# EAGLE board Canberry 2.0 (EAGLE 6.6.0)
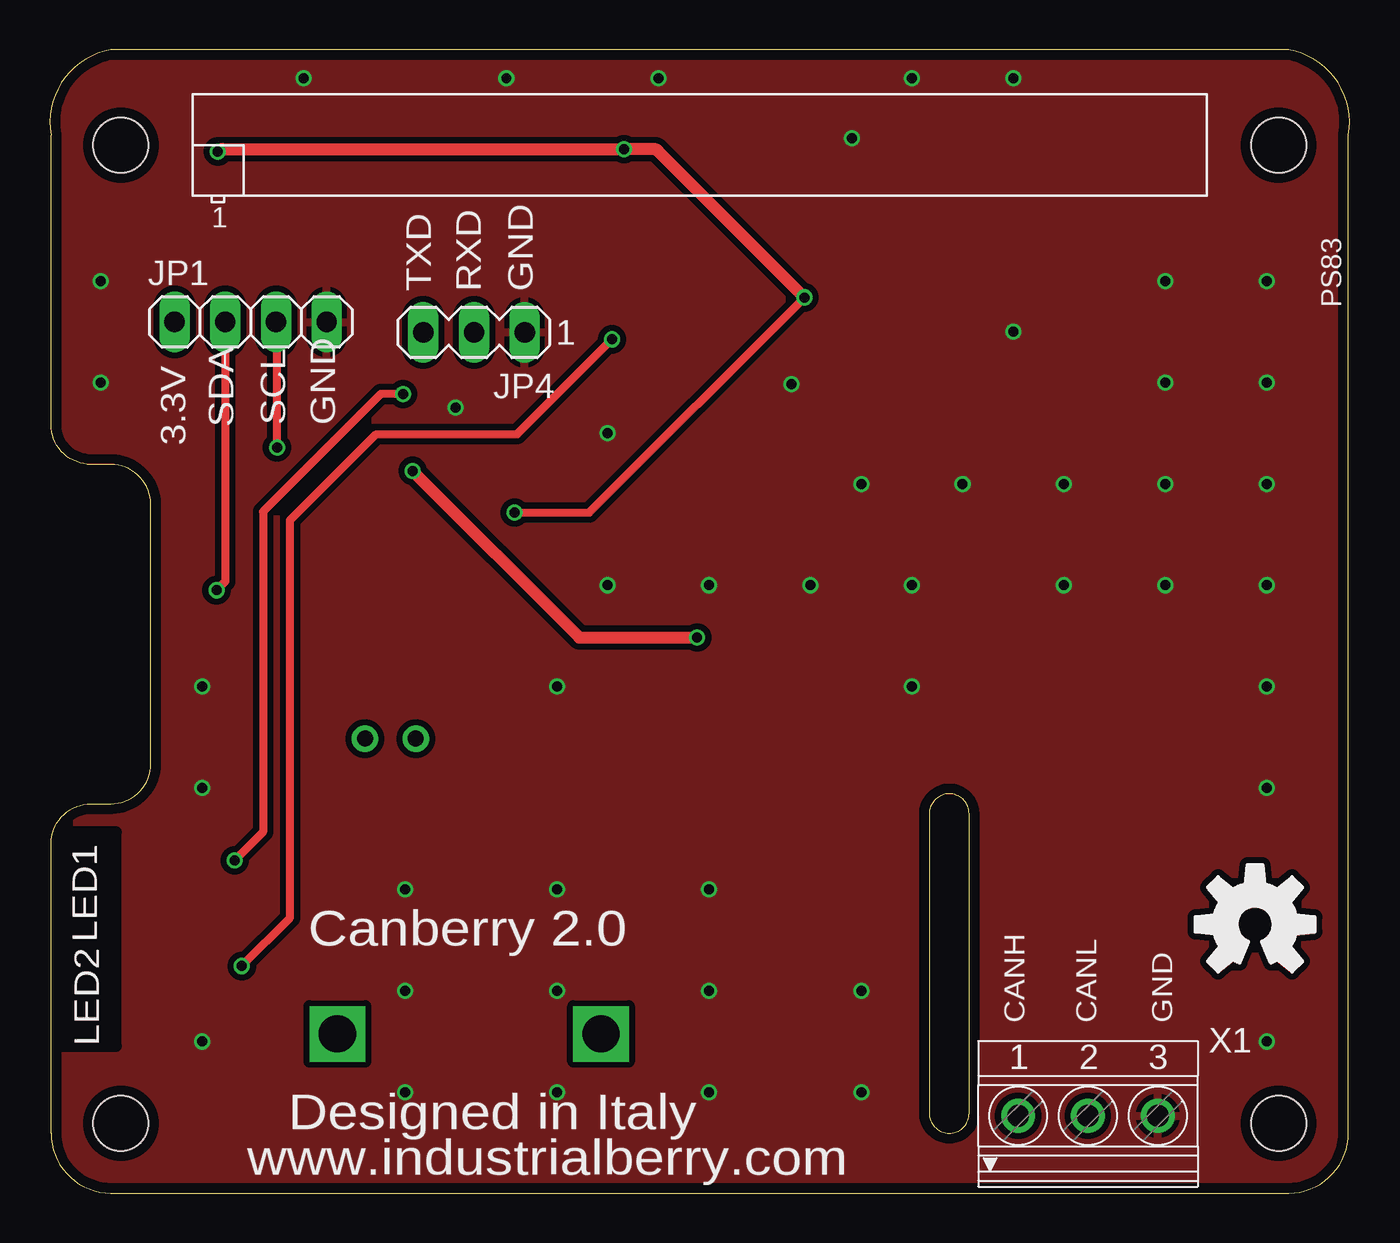
[diagram p0: board, top side]
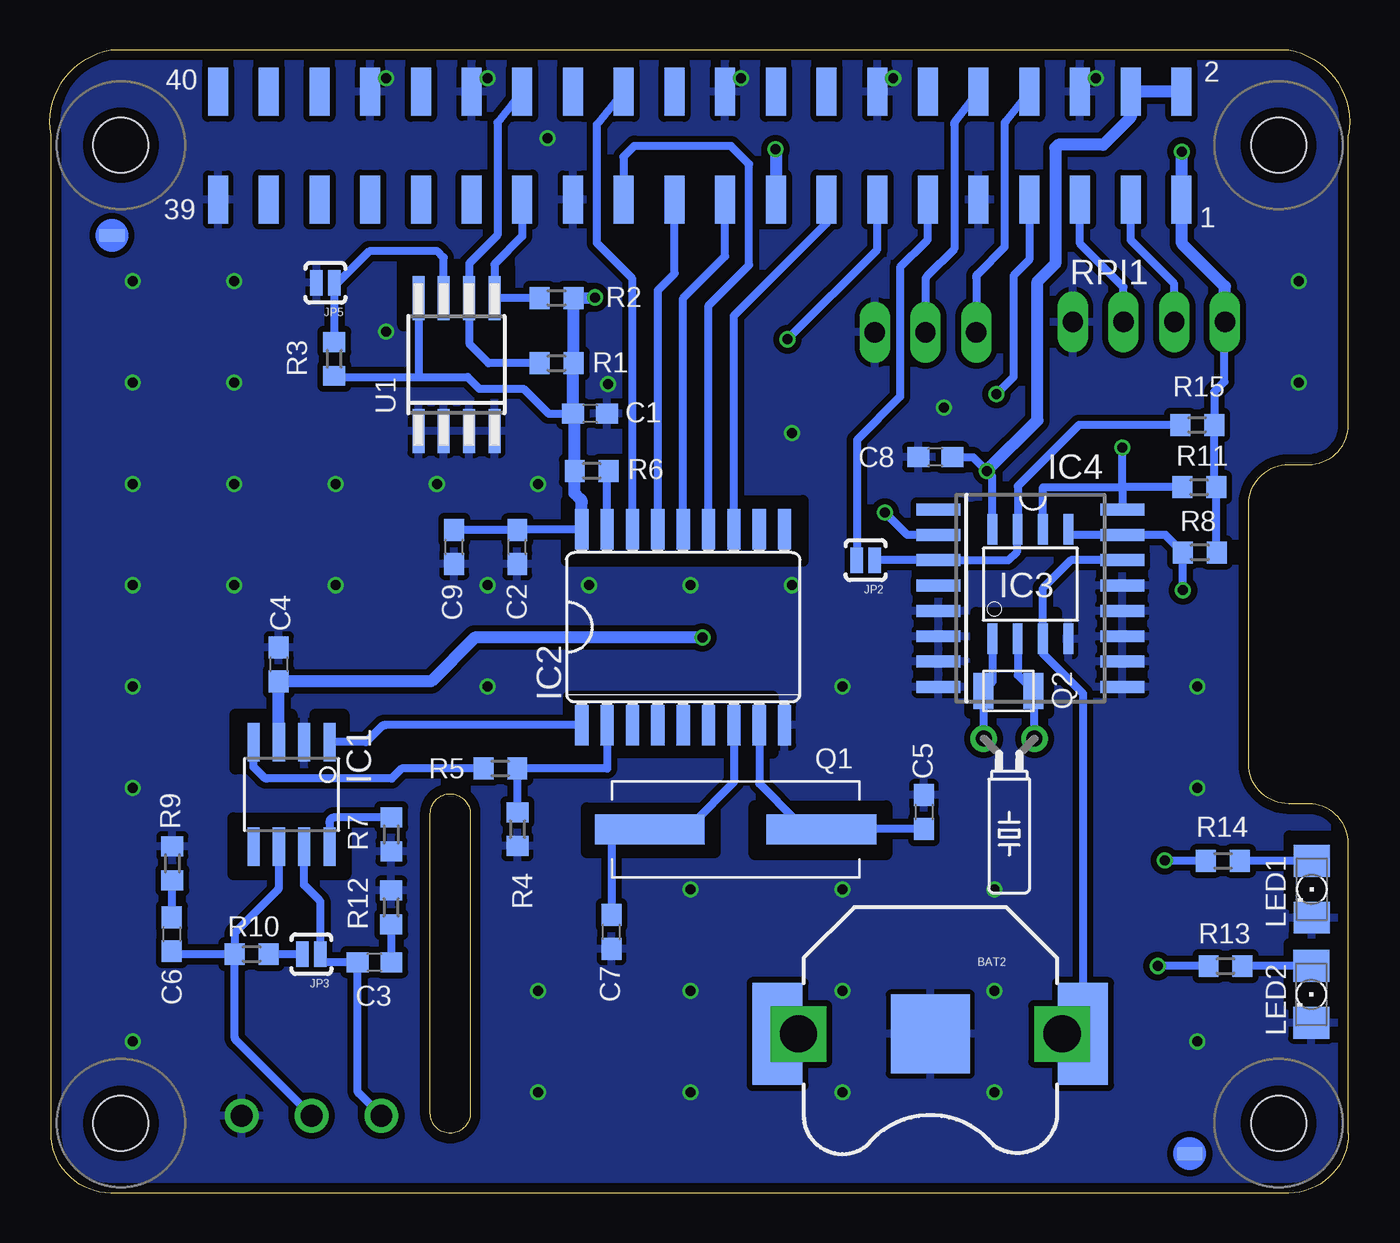
[diagram p1: board, bottom side, seen from below]

Size 65.11 x 57.27 mm. Coordinates in mm from the lower left corner, seen from the top.
Copper layers (1*16): Top 0.035mm / dielectric 1.5mm / Bottom 0.035mm
Design rules "ITEADstudio_DRC *": minimum track width 10mil, minimum drill 12mil, track to track 10mil, track to pad 10mil, pad to pad 10mil, via to via 10mil, smd to smd 0mil, copper to edge 20mil, drill to drill 20mil, minimum pad ring 10mil, minimum via ring 6mil, stop-mask expansion 2mil, vias tented up to drill 100mil, thermal gap 10mil
tRestrict: area 0.6,7.4 to 3.3,18.1
bRestrict: area 0.8,14.5 to 3,17.9; area 0.8,9.5 to 3,12.5; area 23.2,17 to 29.8,19.4; area 31.8,17.1 to 38.2,19.3; area 28.9,22.1 to 39.1,24.9; area 27.4,31.7 to 39.2,34.7; area 50.3,16 to 55.9,18.8; area 53,21.3 to 55.8,24; area 50.4,21.5 to 51.8,24; area 42.1,43.5 to 47.4,46.4; area 14.7,26.7 to 18.7,29.1; area 15.1,24.1 to 19,26.3; area 13.5,32.2 to 18.7,34.4

## Footprints (pad centres in the part's own frame; a part is rotated, then mirrored left to right if it is on the bottom)
BATTCON_12MM = smd 3.962 x 3.962: GND 0,0 | smd 2.5 x 5.1: PWR@1 -7.65,0; PWR@2 7.65,0
BATTCON_12MM_PTH = smd 3.962 x 3.962: GND 0,0 | drill 1.854 square: VCC@1 -6.604,0; VCC@2 6.604,0
C0603 = smd 1.1 x 1: 1 -0.85,0; 2 0.85,0
FIDUCIAL-LAMINA = smd 1.27 x 0.635: P$1 0,0
SO08 = smd 0.61 x 1.905: 1 -1.905,-2.616; 2 -0.635,-2.616; 3 0.635,-2.616; 4 1.905,-2.616; 5 1.905,2.616; 6 0.635,2.616; 7 -0.635,2.616; 8 -1.905,2.616
SO18L = smd 0.66 x 2.032: 1 -5.08,-4.902; 2 -3.81,-4.902; 3 -2.54,-4.902; 4 -1.27,-4.902; 5 0,-4.902; 6 1.27,-4.902; 7 2.54,-4.902; 8 3.81,-4.902; 9 5.08,-4.902; 10 5.08,4.902; 11 3.81,4.902; 12 2.54,4.902; 13 1.27,4.902; 14 0,4.902; 15 -1.27,4.902; 16 -2.54,4.902; 17 -3.81,4.902; 18 -5.08,4.902
SO8 = smd 0.5 x 1.524: 1 -1.905,-2.743; 2 -0.635,-2.743; 3 0.635,-2.743; 4 1.905,-2.743; 5 1.905,2.743; 6 0.635,2.743; 7 -0.635,2.743; 8 -1.905,2.743
SOIC-16W = smd 0.6 x 2.2: 1 -4.445,-4.6; 2 -3.175,-4.6; 3 -1.905,-4.6; 4 -0.635,-4.6; 5 0.635,-4.6; 6 1.905,-4.6; 7 3.175,-4.6; 8 4.445,-4.6; 9 4.445,4.6; 10 3.175,4.6; 11 1.905,4.6; 12 0.635,4.6; 13 -0.635,4.6; 14 -1.905,4.6; 15 -3.175,4.6; 16 -4.445,4.6
1X04 = drill 1.016 long: 1 -3.81,0; 2 -1.27,0; 3 1.27,0; 4 3.81,0
SJ_2S-NO = smd 0.635 x 1.27: 1 -0.45,0; 2 0.45,0
MA03-1 = drill 1.016 long: 1 -2.54,0; 2 0,0; 3 2.54,0
1206 = smd 1.6 x 1.803: A -1.422,0; C 1.422,0
CRYSTAL-SMD-10.5X4.8-2PIN = smd 5.5 x 1.5: P$1 -4.3,0; P$2 4.3,0
TC26H = drill 0.813: 1 -1.27,0; 2 1.27,0
R0603 = smd 1 x 1.1: 1 -0.85,0; 2 0.85,0
CONNECTOR_B+_SMT = smd 1 x 2.4 bottom: 1 -24.18,-2.7; 2 -24.18,2.7; 3 -21.64,-2.7; 4 -21.64,2.7; 5 -19.1,-2.7; 6 -19.1,2.7; 7 -16.56,-2.7; 8 -16.56,2.7; 9 -14.02,-2.7; 10 -14.02,2.7; 11 -11.48,-2.7; 12 -11.48,2.7; 13 -8.94,-2.7; 14 -8.94,2.7; 15 -6.4,-2.7; 16 -6.4,2.7; 17 -3.86,-2.7; 18 -3.86,2.7; 19 -1.32,-2.7; 20 -1.32,2.7; 21 1.22,-2.7; 22 1.22,2.7; 23 3.76,-2.7; 24 3.76,2.7; 25 6.3,-2.7; 26 6.3,2.7; 27 8.84,-2.7; 28 8.84,2.7; 29 11.38,-2.7; 30 11.38,2.7; 31 13.92,-2.7; 32 13.92,2.7; 33 16.46,-2.7; 34 16.46,2.7; 35 19,-2.7; 36 19,2.7; 37 21.54,-2.7; 38 21.54,2.7; 39 24.08,-2.7; 40 24.08,2.7 | hole 2.75: -29.05,-48.97; -29.05,0.03; 28.95,-48.97; 28.95,0.03
SOIC8 = smd 0.6 x 2.2: 1 -1.905,-3.33; 2 -0.635,-3.33; 3 0.635,-3.33; 4 1.905,-3.33; 5 1.905,3.33; 6 0.635,3.33; 7 -0.635,3.33; 8 -1.905,3.33
FC-135 = smd 1 x 1.8: 1 -1.3,0; 2 1.2,0
1751251 = drill 1.1 pad 1.7: 1 -3.5,-0.1; 2 0,-0.1; 3 3.5,-0.1

## Placement (x,y rotation side)
BAT1  [BATTCON_12MM]  21,7.97 180 bottom
BAT2  [BATTCON_12MM_PTH]  21,7.97 180 bottom
C1  100nF  [C0603]  38.04,39.05 180 bottom
C2  100nF  [C0603]  41.69,32.36 90 bottom
C3  n.c.  [C0603]  48.85,11.56 180 bottom
C4  100nF  [C0603]  53.64,26.49 270 bottom
C5  22pF  [C0603]  21.32,19.09 270 bottom
C6  n.c.  [C0603]  59,12.97 270 bottom
C7  22pF  [C0603]  36.97,13.08 90 bottom
C8  100nF  [C0603]  20.75,36.87 180 bottom
C9  1uF  [C0603]  44.85,32.37 90 bottom
F1  [FIDUCIAL-LAMINA]  8,1.97 0 bottom
F2  [FIDUCIAL-LAMINA]  62,47.97 0 bottom
IC1  MCP2551  [SO08]  53,19.97 180 bottom
IC2  MCP2515-I  [SO18L]  33.38,28.35 0 bottom
IC3  DS1307  [SO8]  15.99,30.51 0 bottom
IC4  DS3231  [SOIC-16W]  15.99,29.8 270 bottom
JP1  [1X04]  10.05,43.64 0 top
JP2  [SJ_2S-NO]  24.24,31.71 180 bottom
JP3  [SJ_2S-NO]  52,11.97 180 bottom
JP4  [MA03-1]  21.24,43.12 180 top
JP5  [SJ_2S-NO]  51.3,45.6 180 bottom
LED1  [1206]  1.89,15.22 270 bottom
LED2  [1206]  1.92,9.95 270 bottom
Q1  16Mhz  [CRYSTAL-SMD-10.5X4.8-2PIN]  30.75,18.22 0 bottom
Q2  32.768kHz  [TC26H]  17.05,22.77 180 bottom
R1  3.9k  [R0603]  39.72,41.57 180 bottom
R2  3.9k  [R0603]  39.73,44.84 180 bottom
R3  1k  [R0603]  50.86,41.79 90 bottom
R4  18k  [R0603]  41.68,18.23 270 bottom
R5  10k  [R0603]  42.54,21.27 0 bottom
R6  4k7  [R0603]  37.96,36.18 0 bottom
R7  4k7  [R0603]  48,17.97 90 bottom
R8  10k  [R0603]  7.5,32.1 0 bottom
R9  n.c.  [R0603]  58.97,16.52 90 bottom
R10  120R  [R0603]  55,11.97 0 bottom
R11  10k  [R0603]  7.53,35.36 0 bottom
R12  n.c.  [R0603]  48.01,14.31 90 bottom
R13  500R  [R0603]  6.21,11.37 0 bottom
R14  500R  [R0603]  6.34,16.64 0 bottom
R15  10k  [R0603]  7.63,38.48 0 bottom
RPI1  [CONNECTOR_B+_SMT]  32.6,52.47 0 top
U1  EEPROM24  [SOIC8]  44.74,41.5 0 bottom
U$1  XTAL32K  [FC-135]  17.03,25.15 0 bottom
X1  1751251  [1751251]  52,3.97 0 top

## Library data of the parts
BAT1 BAT2 JP2 JP3 JP5 Q1 = SparkFun
C1-C9 R1-R15 = rcl
F1 F2 IC3 U$1 = PierpaoloSmartSpaceSolutions
IC1 = microchip-dspic
IC2 = mcp2515
IC4 = DS3231_industrialberry
JP1 = pinhead
JP4 = MirkoSmartSpaceSolutions
LED1 LED2 = led
Q2 = crystal
RPI1 = Connector_B+
U1 = FLYFISH
X1 = con-phoenix-350

## Nets
+5V: C4.2 C8.1 IC1.3 IC3.8 RPI1.2 RPI1.4
GND: BAT1.GND BAT2.GND C1.1 C2.1 C4.1 C5.1 C7.1 C8.2 C9.1 IC1.2 IC2.9 IC3.4 IC4.5 IC4.6 IC4.7 IC4.8 IC4.9 IC4.10 IC4.11 IC4.12 IC4.13 JP1.4 JP4.1 JP5.2 LED1.C LED2.C R4.2 R7.1 R9.2 R12.2 RPI1.6 RPI1.9 RPI1.14 RPI1.20 RPI1.25 RPI1.30 RPI1.34 RPI1.39 U1.1 U1.2 U1.3 U1.4 X1.3
ID_SC: R1.2 RPI1.28 U1.6
ID_SD: R2.2 RPI1.27 U1.5
LED1: R13.1 RPI1.13
LED2: R14.1 RPI1.7
N$1: IC4.4
N$3: JP5.1 R3.2 U1.7
N$4: IC3.7 IC4.3 JP2.1 R15.1
N$6: C7.2 IC2.7 Q1.P$1
N$7: IC2.2 R4.1 R5.2
N$8: IC1.4 R5.1
N$9: IC1.1 IC2.1
N$10: IC1.8 R7.2
N$11: IC2.17 R6.2
N$12: C6.1 R9.1
N$13: C3.1 R12.1
N$14: LED2.A R13.2
N$15: C5.2 IC2.8 Q1.P$2
N$16: LED1.A R14.2
N$22: C3.2 IC1.7 JP3.1 X1.1
N$23: C6.2 IC1.6 R10.1 X1.2
N$24: JP3.2 R10.2
OSCI: IC3.1 Q2.2 U$1.1
OSCO: IC3.2 Q2.1 U$1.2
OUT: JP2.2 RPI1.11
PI_GPIO_PIN22: IC2.12 RPI1.15
PI_SPI_CE0: IC2.16 RPI1.24
PI_SPI_MISO: IC2.15 RPI1.21
PI_SPI_MOSI: IC2.14 RPI1.19
PI_SPI_SCLK: IC2.13 RPI1.23
RXD: JP4.2 RPI1.10
SCL: IC3.6 IC4.16 JP1.3 R11.1 RPI1.5
SDA: IC3.5 IC4.15 JP1.2 R8.1 RPI1.3
TXD: JP4.3 RPI1.8
V+: C1.2 C2.2 C9.2 IC2.18 IC4.2 JP1.1 R1.1 R2.1 R3.1 R6.1 R8.2 R11.2 R15.2 RPI1.1 RPI1.17 U1.8
VBAT: BAT1.PWR@1 BAT2.VCC@1 IC3.3 IC4.14

## Tracks (layer width: path | path; a pad name or v marks a point on that pad's centre or on a via)
+5V  (via drill 0.5)
  Top 0.61: v18.17,36.18 26.52,27.83 v32.42,27.83
  Bottom 0.406: 53.64,25.63 arc-45 C4.2 | IC3.8 17.9,35.91 v18.17,36.18 18.86,36.87 C8.1
  Bottom 0.61: RPI1.2 RPI1.4 10.96,53.9 12.34,52.52 14.59,52.52 14.74,52.37 14.74,46.56 15.63,45.67 15.63,38.71 18.16,36.19 arc45 v18.17,36.18 | IC1.3 arc45 IC1.3 C4.2 46.02,25.64 43.83,27.83 v32.42,27.83
GND  (via drill 0.5)
  other vias: 2.54,45.69 2.54,40.61 27.94,38.07 12.7,55.85 22.86,55.85 30.48,55.85 43.18,55.85 48.26,55.85 55.88,45.69 48.26,43.15 50.8,35.53 40.64,35.53 43.18,30.45 38.1,30.45 33.02,30.45 27.94,30.45 25.4,25.37 43.18,25.37 50.8,30.45 33.02,15.21 33.02,10.13 40.64,10.13 40.64,5.05 60.96,7.59 60.96,25.37 60.96,30.45 55.88,30.45 55.88,35.53 55.88,40.61 60.96,40.61 60.96,35.53 60.96,45.69 60.96,20.29 7.62,7.59 33.02,5.05 7.62,20.29 7.62,25.37 20.32,39.34 25.4,15.21 17.78,15.21 17.78,10.13 17.78,5.05 25.4,5.05 25.4,10.13 45.72,35.53 40.18,52.85 37.14,40.53
  pour Bottom (isolate 0.305): 0,-0.03 0,57.97 65,57.97 65,-0.03
  pour Top (isolate 0.305): 0,-0.03 0,57.97 65,57.97 65,-0.03
ID_SC
  Bottom 0.406: RPI1.28 42.68,53.63 42.68,47.99 43.6,47.07 43.61,47.07 44.11,46.57 U1.6 44.08,44.81 44.08,42.52 43.13,41.57 R1.2
ID_SD
  Bottom 0.406: RPI1.27 41.44,47.93 42.84,46.53 U1.5 R2.2
LED1  (via drill 0.5)
  Top 0.406: v9.61,11.37 12.03,13.79 12.03,33.71 16.34,38.02 23.41,38.02 v28.16,42.77
  Bottom 0.406: R13.1 v9.61,11.37 | v28.16,42.77 23.66,47.27 RPI1.13
LED2  (via drill 0.5)
  Top 0.406: v17.69,40.03 16.57,40.03 10.67,34.13 10.67,18.08 v9.25,16.66
  Bottom 0.406: RPI1.7 16.04,46.75 16.83,45.96 16.83,40.89 v17.69,40.03 | v9.25,16.66 7.21,16.66 R14.1
N$3
  Bottom 0.406: 45.35,44.81 U1.7 45.38,46.87 45.69,47.18 49.11,47.18 50.69,45.6 JP5.1 R3.2
N$4
  Bottom 0.406: JP2.1 IC4.3 17.1,31.7 16.65,32.15 16.65,33.73 IC3.7 16.62,33.76 16.62,35.41 13.55,38.48 R15.1
N$6
  Bottom 0.406: IC2.7 30.84,20.59 32.95,18.48 34.79,18.48 Q1.P$1 36.97,18.22 C7.2
N$7
  Bottom 0.406: IC2.2 37.19,21.27 R5.2 R4.1
N$8
  Bottom 0.406: IC1.4 arc45 54.9,22.57 54.9,21.34 54.41,20.84 arc-45 54.23,20.77 47.98,20.77 47.48,21.27 R5.1
N$9
  Bottom 0.406: IC2.1 48.31,23.45 arc-45 48.49,23.37 49.27,22.59 IC1.1 arc-45 IC1.1
N$10
  Bottom 0.406: R7.2 50.85,18.82 arc-90 51.1,18.57 IC1.8
N$11
  Bottom 0.406: IC2.17 37.19,36.1 R6.2
N$12
  Bottom 0.406: C6.1 arc-90 58.97,13.85 R9.1
N$13
  Bottom 0.406: R12.1 arc45 48,13.44 C3.1
N$14
  Bottom 0.406: LED2.A R13.2
N$15
  Bottom 0.406: C5.2 26.45,18.24 Q1.P$2 26.93,18.7 27.76,18.7 29.57,20.51 IC2.8
N$16
  Bottom 0.406: LED1.A R14.2
N$17
  Top 0.2: 59.28,11.71 arc10 59.59,11.55 60.02,12.59 arc-247 61.31,13.46 arc-67 60.73,12.59 61.16,11.55 arc10 61.47,11.71 62.22,11.1 62.74,11.61 62.12,12.37 arc19 62.38,13 63.35,13.09 63.35,13.83 62.38,13.92 arc19 62.12,14.55 62.74,15.31 62.22,15.82 61.47,15.21 arc19 60.84,15.47 60.74,16.44 60.01,16.44 59.91,15.47 arc19 59.28,15.21 58.53,15.82 58.01,15.31 58.63,14.55 arc19 58.36,13.92 57.4,13.83 57.4,13.09 58.36,13 arc19 58.63,12.37 58.01,11.61 58.53,11.1 59.28,11.71
N$22
  Bottom 0.406: IC1.7 52.39,17.37 arc45 52.46,17.55 52.46,17.86 52.45,17.84 arc45 52.37,17.66 52.37,15.43 51.63,14.68 arc45 51.55,14.5 JP3.1 51.55,11.81 arc-90 51.3,11.56 C3.2 49.7,5.17 arc-45 49.63,5 X1.1
N$23
  Bottom 0.406: IC1.6 53.64,15.35 arc45 53.71,15.17 55.78,13.1 arc-45 55.85,12.92 R10.1 | R10.1 58.85,11.97 arc90 C6.2 | X1.2 55.78,7.65 arc45 55.85,7.82 R10.1
N$24
  Bottom 0.406: JP3.2 R10.2
OSCI
  Bottom 0.406: Q2.2 18.32,25.54 U$1.1 17.9,25.58 IC3.1
OSCO
  Bottom 0.406: Q2.1 15.78,25.5 U$1.2 16.63,25.95 IC3.2
OUT
  Bottom 0.406: RPI1.11 21.12,47.88 arc45 21.2,47.7 22.51,46.38 22.51,39.89 24.67,37.73 24.67,31.73 JP2.2
PI_GPIO_PIN22
  Bottom 0.406: IC2.12 30.84,43.95 26.2,48.59 RPI1.15
PI_SPI_CE0
  Bottom 0.406: IC2.16 35.92,45.81 37.7,47.59 37.7,53.53 RPI1.24
PI_SPI_MISO
  Bottom 0.406: IC2.15 34.65,45.23 33.81,46.07 33.81,50.06 RPI1.21
PI_SPI_MOSI
  Bottom 0.406: IC2.14 33.38,44.83 31.28,46.93 RPI1.19
PI_SPI_SCLK
  Bottom 0.406: IC2.13 32.11,44.46 30.08,46.49 30.08,51.55 30.98,52.45 35.81,52.45 35.82,52.46 36.37,51.91 36.37,50.08 RPI1.23
RXD
  Bottom 0.406: RPI1.10 19.73,53.72 arc-45 19.8,53.55 19.8,47.29 21.17,45.92 arc-45 21.24,45.74 JP4.2
SCL  (via drill 0.5)
  Top 0.406: v11.37,37.35 11.37,43.59 JP1.3
  Bottom 0.406: 11.4,43.56 JP1.3 11.32,45.39 13.5,47.57 RPI1.5 | R11.1 11.39,35.36 | 11.39,35.36 IC4.16 | IC3.6 15.36,35.36 11.39,35.36 | 11.39,35.36 11.39,37.33 v11.37,37.35
SDA  (via drill 0.5)
  Top 0.406: JP1.2 8.78,30.64 v8.34,30.2
  Bottom 0.406: JP1.2 8.78,45.56 10.96,47.74 RPI1.3 | IC3.5 14.09,32.98 IC4.15 9.23,32.98 R8.1 v8.34,30.2
TXD
  Bottom 0.406: RPI1.8 17.21,53.7 arc-45 17.28,53.52 17.28,47.39 18.63,46.04 arc-45 18.7,45.87 JP4.3
V+  (via drill 0.5)
  Top 0.406: v23.27,34.09 27.01,34.09 v37.79,44.87
  Top 0.61: v37.79,44.87 30.44,52.23 arc45 30.26,52.3 v28.76,52.3 8.64,52.3 arc45 8.46,52.23 v8.41,52.18
  Bottom 0.406: R1.1 38.89,41.55 | R2.1 | R3.1 50.8,40.88 46.65,40.88 | 46.65,40.88 44.18,40.88 43.6,40.3 41.38,40.3 40.12,39.04 C1.2 38.81,39.05 | U1.8 46.65,40.88 | IC2.18 41.65,33.25 C2.2 C9.2 | JP1.1 6.27,43.61 6.27,40.65 6.78,40.14 R15.2 6.78,35.46 R11.2 6.68,32.13 R8.2 | IC4.2 22.16,32.98 v23.27,34.09
  Bottom 0.61: JP1.1 6.24,45.42 8.39,47.57 8.39,50.04 RPI1.1 arc-45 8.41,50.09 v8.41,52.18 | IC2.18 38.46,34.59 arc-45 38.54,34.76 38.83,35.06 38.83,36.13 arc45 R6.1 38.81,38.87 arc-45 C1.2 38.89,41.52 arc45 R1.1 38.87,44.82 arc-45 R2.1 v37.79,44.87 | v28.76,52.3 arc45 28.74,52.25 RPI1.17
VBAT
  Bottom 0.406: IC4.14 13.96,31.7 15.36,30.3 IC3.3 | IC3.3 15.36,27.41 | BAT2.VCC@1 BAT1.PWR@1 13.35,25.02 15.36,27.02 IC3.3

## Text on the board
tPlace: Canberry 2.0 | Designed in Italy | www.industrialberry.com
_tNames: TXD | RXD | GND | 3.3V | SDA | SCL | GND | LED1 | LED2 | CANH | CANL | GND